# Allegro board ANALYSIS_4.brd
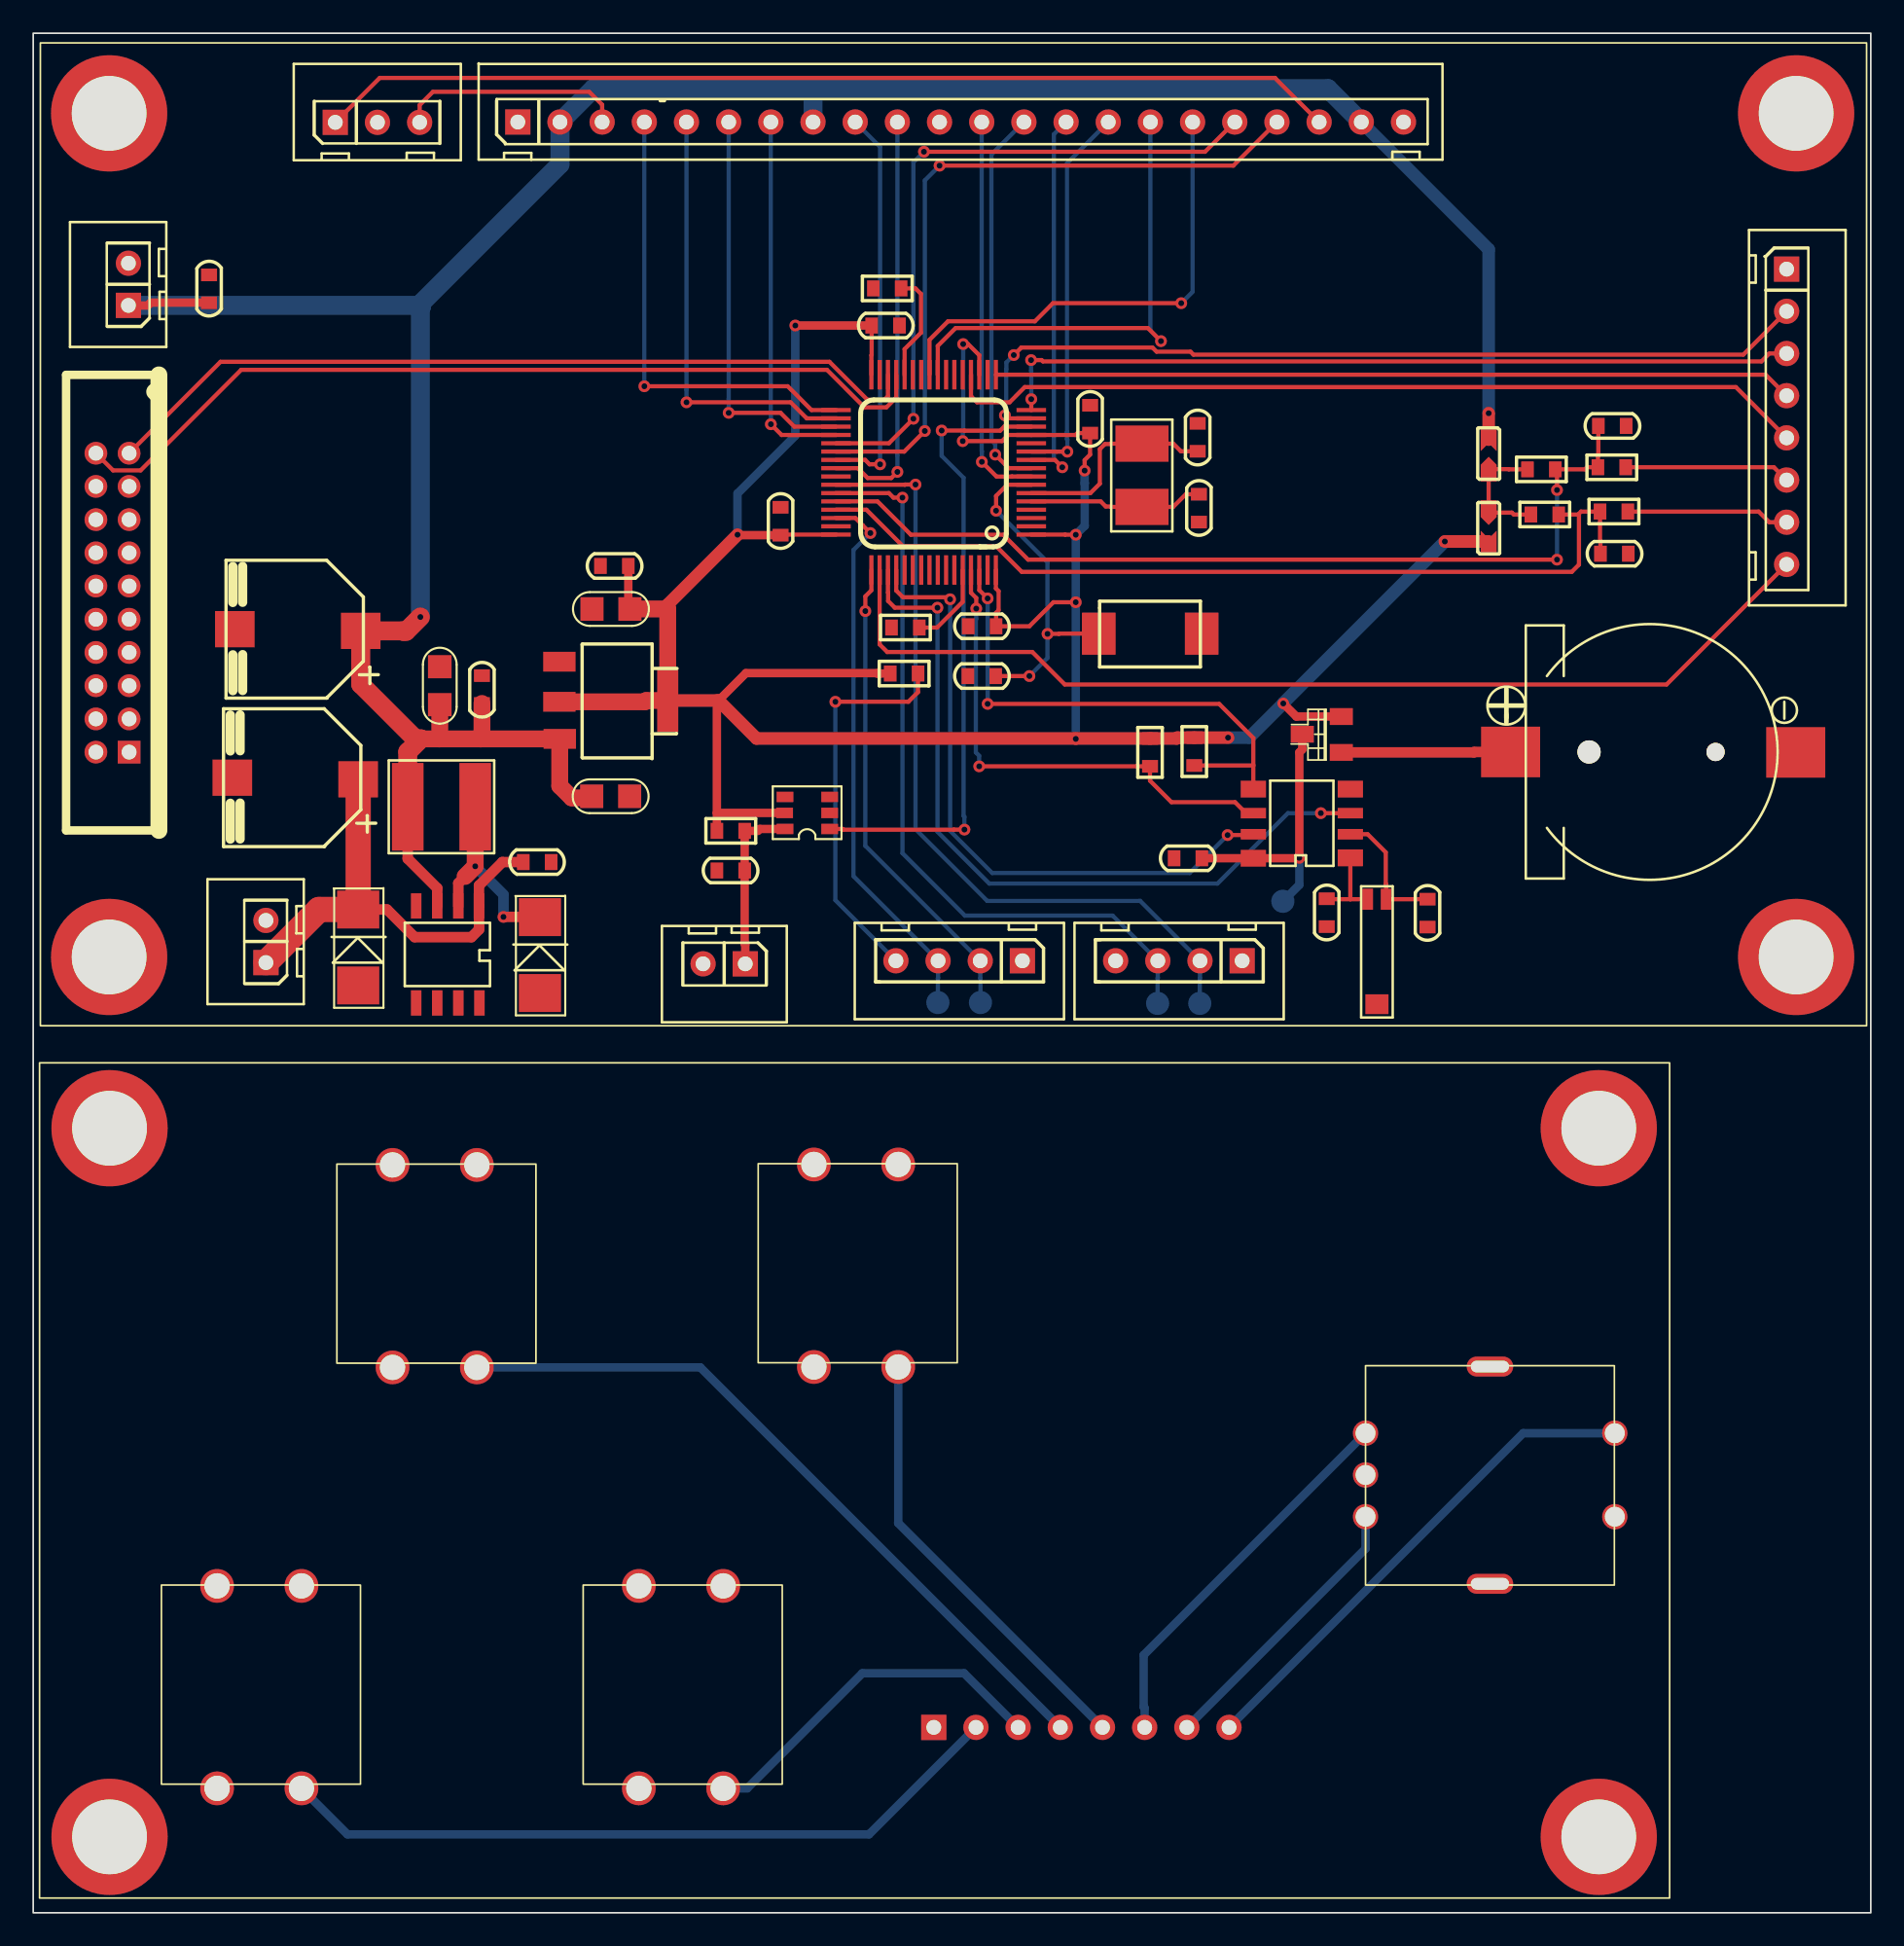
[diagram p0: board, top side]
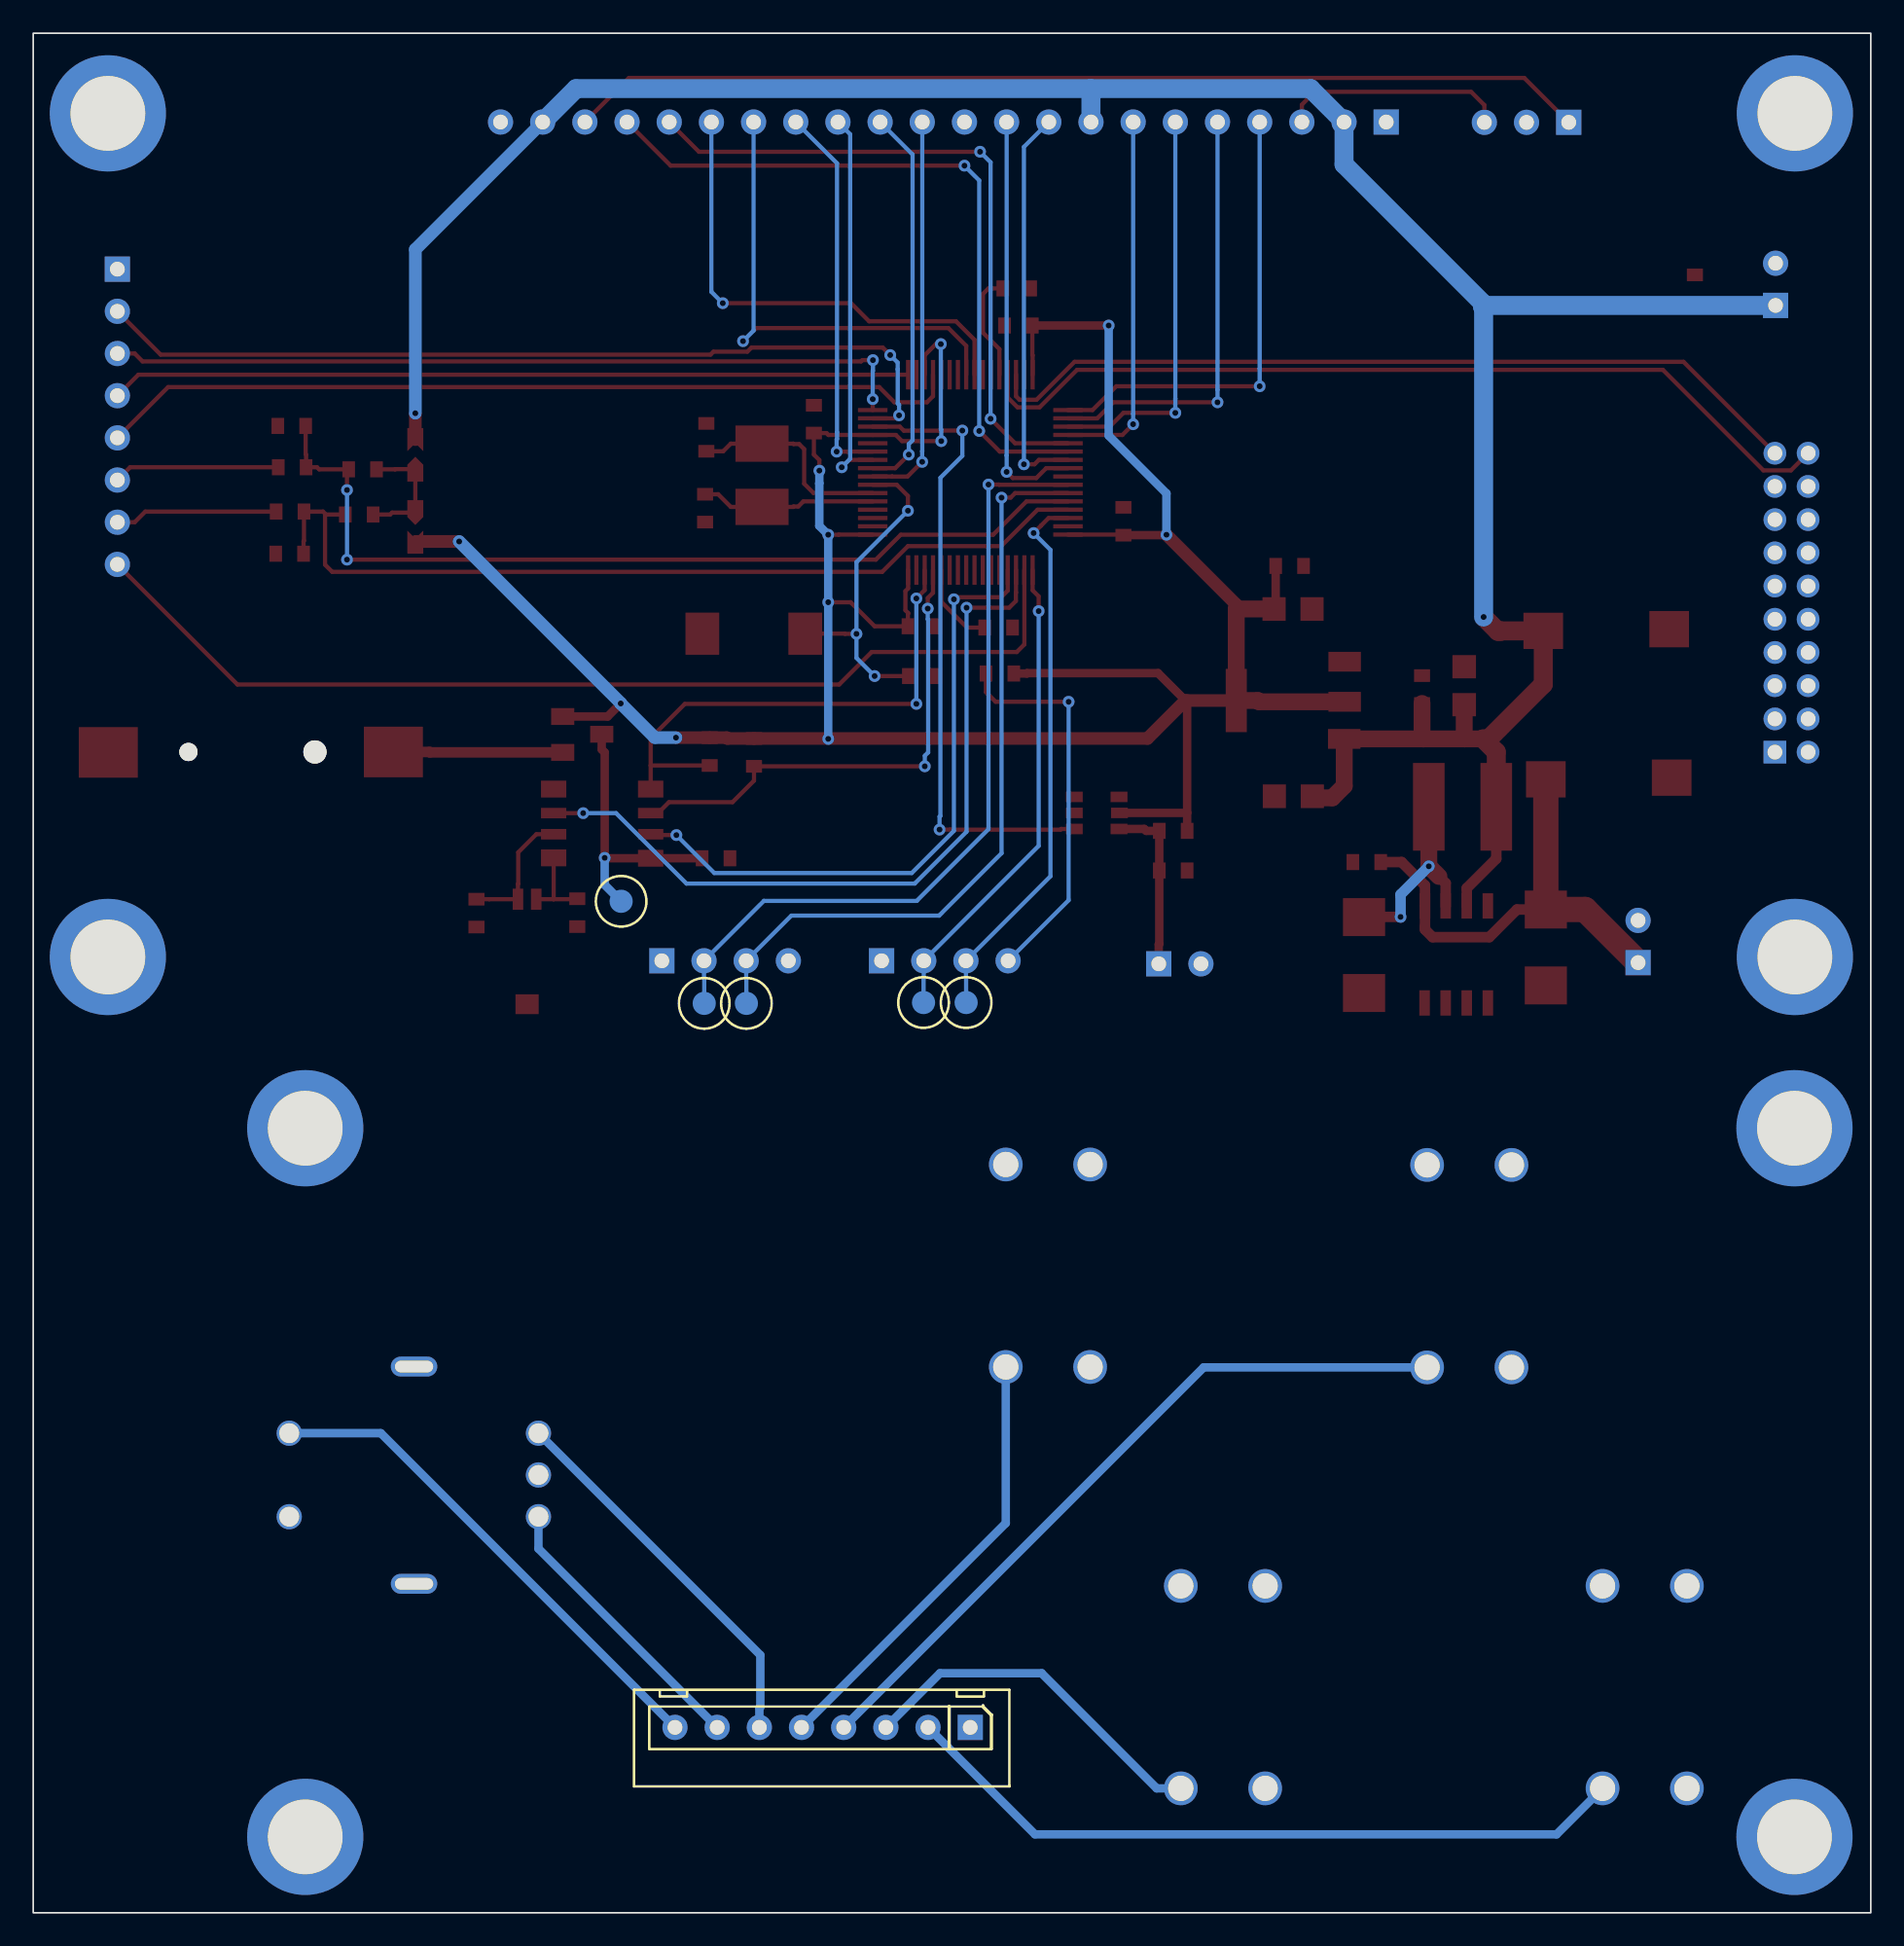
[diagram p1: board, bottom side, seen from below]

Outline 110.67 x 113.18 mm; copper layers: TOP, BOTTOM. Coordinates in mm from the lower left corner of the outline.
Outline path: rectangle 0,0 110.67,113.18

## Placement (name value [footprint] x y rotation side)
C1  0.1uF  [C0603]  51.33 95.58 0 top
C2  0.1uF  [C0603]  63.65 89.94 90 top
C3  0.1uF  [C0603]  45.01 83.79 90 top
C4  0.1uF  [C0603]  10.59 97.79 90 top
C5  0.1uF  [C0603]  42.01 62.76 180 top
C6  0.1uF  [C0603]  57.15 77.47 180 top
C7  15pF  [C0603]  70.13 88.85 270 top
C8  15pF  [C0603]  70.21 84.58 90 top
C9  0.1uF  [C0603]  57.12 74.47 0 top
C10  0.1uF  [C0603]  95.22 81.84 0 top
C11  0.1uF  [C0603]  95.1 89.53 0 top
C12  0.1uF  [C0603]  69.55 63.5 180 top
C13  5pF  [C0603]  83.97 60.2 90 top
C14  5pF  [C0603]  77.9 60.22 90 top
C15  220uf/35V  [CAP_SMD_8X10D5]  17.75 63.3 180 top
C16  0.1uF  [C0603]  30.35 63.27 180 top
C17  220uf/35V  [CAP_SMD_8X10D5]  17.9 72.24 180 top
C18  0.1uF  [C0603]  27.03 73.66 270 top
C19  10uF  [C0805]  24.49 73.89 270 top
C20  10uF  [C0805]  34.79 78.51 0 top
C21  10uF  [C0805]  34.78 67.23 180 top
C22  0.1uF  [C0603]  35 81.1 0 top
D1  BAT54C  [SOT23-3]  77.61 70.97 0 top
D2  SMBJ12A  [SMA]  19.57 58.13 270 top
D3  SS34  [SMA]  30.52 57.67 270 top
H1  NC/mechanical _pad  [HOLE_4D5MM]  4.57 57.56 0 top
H2  NC/mechanical _pad  [HOLE_4D5MM]  4.57 108.36 0 top
H3  NC/mechanical _pad  [HOLE_4D5MM]  106.17 108.36 0 top
H4  NC/mechanical _pad  [HOLE_4D5MM]  106.17 57.56 0 top
H5  NC/mechanical _pad  [HOLE_4D5MM]  4.6 47.24 0 top
H6  NC/mechanical _pad  [HOLE_4D5MM]  4.6 4.57 0 top
H7  NC/mechanical _pad  [HOLE_4D5MM]  94.28 4.57 0 top
H8  NC/mechanical _pad  [HOLE_4D5MM]  94.28 47.24 0 top
J1  HEADER 8  [XH-8A]  54.23 11.15 0 bottom
J2  HEADER 5  [SW3_2]  85.32 26.09 0 top
J3  -  [XH-2A]  5.73 96.79 90 top
J4  HEADER 20X2  [HEADER10X2_2MMP]  4.78 78.89 180 top
J5  HEADER 2  [XH-2A]  42.88 57.14 180 top
J6  0  [DEBUG0603_V1]  87.66 83.55 270 top
J7  0  [DEBUG0603_V1]  87.66 87.69 90 top
J8  HEADER 8  [XH-8A]  105.61 98.98 270 top
J9  LCD  [XH-22A]  32.13 94.59 0 top
JP_1  -  [XH-2A]  14.01 57.22 90 top
JP_SWD1  -  [XH-4A]  59.58 57.33 180 top
JS_BAT1  BAT  [CR1220_SOCKET_V1]  97.26 69.9 270 top
JS_USART1  NC/XH-4A  [XH-4A]  72.81 57.33 180 top
KS_REST  KEY_3x6x2d5_2p_SMD  [KEY_3X6X2D5_2P_SMD]  67.22 77.2 0 top
L1  47UH  [CD54]  24.59 66.6 90 top
NOREF  -  []  0.43 53.42 90 top
NOREF#2  -  []  0.38 0.89 0 top
NOREF#3  -  []  49.56 40.23 90 top
NOREF#4  -  []  4.6 4.57 90 top
NOREF#5  -  []  0.38 0.89 90 top
NOREF#6  -  []  4.6 4.57 0 top
NOREF#7  -  []  4.57 57.56 90 top
NOREF#8  -  []  4.57 108.36 0 top
NOREF#9  -  []  0.43 112.6 0 top
NOREF#10  -  []  49.56 39.19 0 top
R1  220K  [R0603]  42.01 65.15 180 top
R2  10K  [R0603]  91.03 84.2 180 top
R3  10K  [R0603]  90.83 86.92 180 top
R4  10K  [R0603]  52.53 77.39 0 top
R5  10K  [R0603]  51.43 97.82 0 top
R6  10K  [R0603]  95.07 87.05 180 top
R7  10K  [R0603]  95.2 84.38 180 top
R8  10R  [R0603]  52.45 74.63 180 top
R9  10k  [XH-3A]  18.19 107.82 0 top
R10  10K  [R0603]  67.26 69.88 270 top
R11  10K  [R0603]  69.93 69.93 270 top
SW1  SW PUSHBUTTON_0  [SW4L]  16.15 7.49 180 top
SW2  SW PUSHBUTTON_0  [SW4L]  41.55 7.49 180 top
SW3  SW PUSHBUTTON_0  [SW4L]  26.72 32.84 180 top
SW4  SW PUSHBUTTON_0  [SW4L]  52.1 32.87 180 top
T1  NC/TEST  [TEST_55C_SMD]  54.48 54.81 180 bottom
T2  NC/TEST  [TEST_55C_SMD]  57.05 54.81 180 bottom
T3  NC/TEST  [TEST_55C_SMD]  75.26 60.91 180 bottom
T4  NC/TEST  [TEST_55C_SMD]  67.72 54.76 180 bottom
T5  NC/TEST  [TEST_55C_SMD]  70.26 54.76 180 bottom
U1  USBLC6-2SC6  [SOT23-6]  46.62 66.23 90 top
U2  STM32F103RB  [LQFP64]  54.23 86.74 180 top
U3  PCF8563T  [SOP8]  79.07 63.68 90 top
U4  XL1509-5.0  [SOIC8]  24.97 57.71 180 top
U5  LM1117-3.3  [SOT-223]  31.74 73 270 top
Y1  8M  [CY5032_2P]  66.78 86.56 90 top
Y2  32.768KHz  [MC_146]  80.92 57.86 270 top

## Library data of the parts
C1-C22 = C
D1 = BAT54C
D2 D3 = DIODE
H1-H8 = PAD
J1 J8 = HEADER 10_0
J2 = 4 HEADER_2
J3 J5 = HEADER 2
J4 = HEADER 10X2_2
J6 J7 = JUMPER1_0
J9 = HEADER 22_0
JP_1 = header_3d5_6
JP_SWD1 JS_USART1 = HEADER 4
JS_BAT1 = BATT
KS_REST SW1-SW4 = SW PUSHBUTTON_0
L1 = INDUCTOR_0
R1-R8 R10 R11 = R
R9 = R_var_0
T1-T5 = TESTPONT
U1 = USB_MINI_SOCKET_5
U2 = STM32F103
U3 = PCF8563
U4 = XL1509
U5 = 1117
Y1 = CRYSTAL
Y2 = MC_146

## Footprints (pads in the part's own frame, mm; a bottom-side part is the same pattern mirrored in y, then rotated)
C0603
  rect 0.762x0.965 smd: 1(-0.838,0) 2(0.838,0)
C0805
  rect 1.397x1.422 smd: 1(-1.143,0) 2(1.143,0)
CAP_SMD_8X10D5
  rect 2.388x2.184 smd: 1(-1.82,-4.95) 2(5.76,-5.05)
CD54
  rect 5.283x1.905 smd: 1(0,2.032) 2(0,-2.032)
CR1220_SOCKET_V1
  round 1.397 hole 1.397 unplated: (0,-3.556)
  rect 3.048x3.556 smd: 1(0,-8.28) 2(0.025,8.89)
  round 1.092 hole 1.092: 3(0,4.064)
CY5032_2P
  rect 2.184x3.2 smd: 1(-1.905,0) 2(1.905,0)
DEBUG0603_V1
  custom 1.499x0.965 smd: 1(-0.762,0)
  custom 1.397x0.965 smd: 2(1.016,0)
HEADER10X2_2MMP
  rect 1.372x1.372 hole 0.889: 1(-1,9)
  round 1.372 hole 0.889: 2(1,9) 3(-1,7) 4(1,7) 5(-1,5) 6(1,5) 7(-1,3) 8(1,3) 9(-1,1) 10(1,1) 11(-1,-1) 12(1,-1) 13(-1,-3) 14(1,-3) 15(-1,-5) 16(1,-5) 17(-1,-7) 18(1,-7) 19(-1,-9) 20(1,-9)
HOLE_4D5MM
  round 7 hole 4.5: 1(0,0)
KEY_3X6X2D5_2P_SMD
  rect 2.032x2.54 smd: 1(-3.048,-0.178) 2(3.15,-0.178)
LQFP64
  rect 1.778x0.254 smd: 1(-5.88,3.749) 2(-5.88,3.251) 3(-5.88,2.751) 4(-5.88,2.25) 5(-5.88,1.75) 6(-5.88,1.25) 7(-5.88,0.749) 8(-5.88,0.249) 9(-5.88,-0.249) 10(-5.88,-0.749) 11(-5.88,-1.25) 12(-5.88,-1.75) 13(-5.88,-2.25) 14(-5.88,-2.751) 15(-5.88,-3.251) 16(-5.88,-3.749) 33(5.88,-3.749) 34(5.88,-3.251) 35(5.88,-2.751) 36(5.88,-2.25) 37(5.88,-1.75) 38(5.88,-1.25) 39(5.88,-0.749) 40(5.88,-0.249) 41(5.88,0.249) 42(5.88,0.749) 43(5.88,1.25) 44(5.88,1.75) 45(5.88,2.25) 46(5.88,2.751) 47(5.88,3.251) 48(5.88,3.749)
  rect 0.254x1.778 smd: 17(-3.749,-5.88) 18(-3.251,-5.88) 19(-2.751,-5.88) 20(-2.25,-5.88) 21(-1.75,-5.88) 22(-1.25,-5.88) 23(-0.749,-5.88) 24(-0.249,-5.88) 25(0.249,-5.88) 26(0.749,-5.88) 27(1.25,-5.88) 28(1.75,-5.88) 29(2.25,-5.88) 30(2.751,-5.88) 31(3.251,-5.88) 32(3.749,-5.88) 49(3.749,5.88) 50(3.251,5.88) 51(2.751,5.88) 52(2.25,5.88) 53(1.75,5.88) 54(1.25,5.88) 55(0.749,5.88) 56(0.249,5.88) 57(-0.249,5.88) 58(-0.749,5.88) 59(-1.25,5.88) 60(-1.75,5.88) 61(-2.25,5.88) 62(-2.751,5.88) 63(-3.251,5.88) 64(-3.749,5.88)
MC_146
  rect 1.27x0.635 smd: 1(-3.173,0.55) 2(-3.173,-0.55)
  rect 1.194x1.397 smd: 3(3.15,0)
R0603
  rect 0.762x0.965 smd: 1(-0.838,0) 2(0.838,0)
SMA
  rect 2.286x2.54 smd: 1(2.286,0) 2(-2.286,0)
SOIC8
  rect 0.635x1.524 smd: 1(-1.88,-2.921) 2(-0.635,-2.921) 3(0.635,-2.921) 4(1.905,-2.921) 5(1.905,2.921) 6(0.635,2.921) 7(-0.635,2.921) 8(-1.905,2.921)
SOP8
  rect 1.016x1.524 smd: 1(-0.152,-0.254) 4(3.988,-0.254) 5(3.988,5.588) 8(-0.178,5.588)
  rect 0.635x1.524 smd: 2(1.27,-0.254) 3(2.54,-0.254) 6(2.54,5.588) 7(1.27,5.588)
SOT23-3
  rect 1.397x1.016 smd: 1(1.168,-1.092) 2(1.168,1.067) 3(-1.181,0)
SOT23-6
  rect 0.635x1.016 smd: 1(-0.965,-1.346) 2(0,-1.346) 3(0.965,-1.346) 4(0.965,1.346) 5(0,1.372) 6(-0.965,1.346)
SOT-223
  rect 1.194x1.956 smd: 1(-2.337,-0.051) 2(0.076,-0.051) 3(2.311,-0.025)
  rect 3.81x1.27 smd: 4(0,6.477)
SW3_2
  round 1.524 hole 1.194: 1(-5.08,2.794) 2(-5.08,0.279) 3(-5.08,-2.235) 4(9.931,2.794) 5(9.931,-2.235)
  oval 2.8x1.2 hole 2.3x0.7: 6(2.413,6.807) 7(2.413,-6.274)
SW4L
  round 2.032 hole 1.524: 1(0,0) 2(0,-12.192) 3(5.08,0) 4(5.08,-12.192)
TEST_55C_SMD
  round 1.397 smd: 1(0,0)
XH-2A
  rect 1.524x1.524 hole 0.889: 1(0,0)
  round 1.524 hole 0.889: 2(2.54,0)
XH-3A
  rect 1.524x1.524 hole 0.889: 1(0,0)
  round 1.524 hole 0.889: 2(2.54,0) 3(5.08,0)
XH-4A
  rect 1.524x1.524 hole 0.889: 1(0,0)
  round 1.524 hole 0.889: 2(2.54,0) 3(5.08,0) 4(7.62,0)
XH-8A
  rect 1.524x1.524 hole 0.889: 1(0.005,-0.013)
  round 1.524 hole 0.889: 2(2.545,-0.013) 3(5.085,-0.013) 4(7.625,-0.013) 5(10.165,-0.013) 6(12.705,-0.013) 7(15.245,-0.013) 8(17.785,-0.013)
XH-22A
  rect 1.524x1.524 hole 0.889: 1(-2.942,13.25)
  round 1.524 hole 0.889: 2(-0.402,13.25) 3(2.138,13.25) 4(4.678,13.25) 5(7.218,13.25) 6(9.758,13.25) 7(12.298,13.25) 8(14.838,13.25) 9(17.378,13.25) 10(19.918,13.25) 11(22.458,13.25) 12(24.998,13.25) 13(27.538,13.25) 14(30.078,13.25) 15(32.618,13.25) 16(35.158,13.25) 17(37.698,13.25) 18(40.238,13.25) 19(42.778,13.25) 20(45.318,13.25) 21(47.858,13.25) 22(50.398,13.25)

## Nets
GND: C1.2 C2.2 C3.2 C4.2 C5.2 C6.2 C7.1 C8.1 C9.1 C10.2 C11.2 C12.2 C13.1 C14.1 C15.2 C16.1 C17.2 C18.1 C19.1 C20.1 C21.1 C22.1 D2.1 D3.1 J1.1 J2.2(G1) J2.5(G2) J3.2 J4.16(GND) J5.2 J8.1 J9.1(VSS) J9.22(LEDK) JP_1.2 JP_SWD1.1 JS_BAT1.2(-) JS_USART1.1 KS_REST.2 R4.1 R5.1 R9.2 SW1.3 SW1.4 SW2.3 SW2.4 SW3.3 SW3.4 SW4.3 SW4.4 U1.2(GND) U2.12(VSSA) U2.18(VSS_4) U2.31(VSS_1) U2.47(VSS_2) U2.63(VSS_3) U3.4(VSS) U4.4(EN) U4.5(GND1) U4.6(GND2) U4.7(GND3) U4.8(GND4) U5.1 Y2.3(GND)
VBAT_CR1220: D1.1(C1) JS_BAT1.1(+)
VCC_5V: C4.1 C17.1 C18.2 C19.2 C21.2 J3.1 J7.2 J9.2(VDD) J9.8(CS2) J9.21(LEDA) L1.1 U4.3(FB) U5.3(IN)
VCC_9V: C15.1 C16.2 D2.2 JP_1.1 U4.1(VIN)
VDD_3V3: C1.1 C2.1 C3.1 C6.1 C20.2 C22.2 D1.2(C2) J6.2 R1.2 R8.2 R10.1 R11.1 U1.5(VBUS) U2.1(VBAT) U2.13(VDDA) U2.19(VDD_4) U2.32(VDD_1) U2.48(VDD_2) U2.64(VDD_3) U5.2(OUT) U5.4
/CS1: J9.7(/CS1) U2.36(PB15/TIM1_CH3N/SPI2_MOSI)
/RD: J9.6(/RD) U2.35(PB14/TIM1_CH2N/SPI2_MISO)
/RST: J9.11(/RST)
/WR: J9.5(/WR) U2.34(PB13/TIM1_CH1N/SPI2_SCK)
BOOT0: R4.2 U2.60(BOOT0)
BOOT1: R5.2 U2.28(PB2/BOOT1)
BUSY: J9.9(BUSY) U2.39(PC8/TIM3_CH3)
DB0: J9.12(DB0) U2.8(PC0/ADC12_IN10)
DB1: J9.13(DB1) U2.9(PC1/ADC12_IN11)
DB2: J9.14(DB2) U2.10(PC2/ADC12_IN12)
DB3: J9.15(DB3) U2.11(PC3/ADC12_IN13)
DB4: J9.16(DB4) U2.24(PC4/ADC12_IN14)
DB5: J9.17(DB5) U2.25(PC5/ADC12_IN15)
DB6: J9.18(DB6) U2.37(PC6/TIM3_CH1)
DB7: J9.19(DB7) U2.38(PC7/TIM3_CH2)
EC11_A: C11.1 R3.1 R6.2 U2.44(PA11/USART1_CTS/CANRX/TIM1_CH4/)
EC11_B: C10.1 R2.1 R7.2 U2.45(PA12/USART1_RTS/CANTX/TIM1_ETR/)
EC11_C: J8.8 U2.50(PA15/JTDI/TIM2_CH1_ETR/SPI1_NSS)
EC11_K: J1.8 J2.4(KEY)
I2C1_SCL: R10.2 U2.61(PB8/I2C1_SCL/CANRX) U3.6(SCL)
I2C1_SDA: R11.2 U2.62(PB9/I2C1_SDA/CANTX) U3.5(SDA)
KEY1: J1.2 SW1.1
KEY2: J1.3 SW2.1
KEY3: J1.4 SW3.1
KEY4: J1.5 SW4.1
KEY_1: J8.2 U2.15(PA1/USART2_RTS/ADC12_IN1/TIM2_C)
KEY_2: J8.3 U2.16(PA2/USART2_TX/ADC12_IN2/TIM2_CH)
KEY_3: J8.4 U2.17(PA3/USART2_RX/ADC12_IN3/TIM2_CH)
KEY_4: J8.5 U2.20(PA4/SPI1_NSS/USART2_CK/ADC12_IN)
LCD_INT: J9.10(INT) U2.40(PC9/TIM3_CH4)
RS: J9.4(RS) U2.33(PB12/TIM1_BKIN/SPI2_NSS)
RTC_CLKOUT: U2.52(PC11) U3.7(CLKOUT)
RTC_INT: U2.51(PC10) U3.3(I\N\T\)
STM32_REST: C9.2 KS_REST.1 U2.7(NRST)
SWCLK: JP_SWD1.2 T2.1 U2.49(PA14/JTCK/SWCLK)
SWDIO: JP_SWD1.3 T1.1 U2.46(PA13/JTMS/SWDIO)
USART1_RX_PA10: JS_USART1.3 T4.1 U2.43(PA10/USART1_RX/TIM1_CH3)
USART1_TX_PA9: JS_USART1.2 T5.1 U2.42(PA9/USART1_TX/TIM1_CH2)
USART3_RXD: J4.19(TXD) U2.30(PB11/TIM2_CH4/USART3_RX)
USART3_TXD: J4.20(RXD) U2.29(PB10/TIM2_CH3/USART3_TX)
N201627: C12.1 D1.3(A) T3.1 U3.8(VDD)
N201649: C14.2 U3.1(OSCI) Y2.2
N202031: JP_SWD1.4 R8.1
N202175: C7.2 U2.6(PD1 OSC_OUT/CANTX) Y1.2
N202187: C8.2 U2.5(PD0 OSC_IN/CANRX) Y1.1
N203157: C13.2 U3.2(OSCO) Y2.1
N208876: D3.2 L1.2 U4.2(OUTPUT)
N211508: U1.1(I/O1) U2.14(PA0-WKUP/USART2_CTS/ADC12_IN0/T)
N214712: C5.1 J5.1 R1.1 U1.6(I/O1X)
N215803: J6.1 J7.1 R2.2 R3.2
N217465: J8.7 R7.1
N217476: J8.6 R6.1
N232878: J9.3(V0) R9.3
N232980: J9.20(VEE) R9.1
N235811: J1.7 J2.3(B)
N235857: J1.6 J2.1(A)

Pads without a net: H1 1; H2 1; H3 1; H4 1; H5 1; H6 1; H7 1; H8 1; J2 6 7; J4 1 2 3 4 5 6 7 8 9 10 11 12 13 14 15 17 18; JS_BAT1 3; JS_USART1 4; SW1 2; SW2 2; SW3 2; SW4 2; U1 3 4; U2 2 3 4 21 22 23 26 27 41 53 54 55 56 57 58 59

## Via types
v1: diameter 0.711, hole 0.356, TOP to BOTTOM, 56 vias

## Routing (per net, layer and track width the routed paths; a pad name or vN(x,y) marks a point on that pad's centre or on a via; arc(x,y) is an arc through that point)
VBAT_CR1220: length 10.2
  TOP w0.635: JS_BAT1.1 86.79,69.9 86.77,69.88 D1.1
VCC_5V: length 171.1
  TOP w0.508: J3.1 6.9,96.79 7.06,96.95 C4.1
  TOP w0.635: U4.3 24.33,61.7 22.56,63.47 L1.1
  TOP w0.762: J7.2 v1(87.66,90.3)
  TOP w1.016: 26.95,70.69 U5.3 31.71,67.86 32.43,67.14 33.54,67.14 C21.2 ; 26.95,70.69 27.03,70.76 C18.2 ; 26.95,70.69 24.46,70.69 ; 24.46,70.69 24.49,70.71 C19.2 ; 24.46,70.69 23.34,70.69
  TOP w1.143: v1(23.32,78.03) 22.45,77.17 22.29,77.17 22.26,77.19 C17.1 19.72,73.98 23.01,70.69 23.34,70.69 22.56,69.9 L1.1
  BOTTOM w0.762: v1(87.66,90.3) 87.66,100.16 J9.21
  BOTTOM w1.143: J3.1 23.26,96.79 23.37,96.69 ; 23.37,96.69 23.32,96.64 v1(23.32,78.03) ; 23.37,96.69 23.37,96.93 31.72,105.28 J9.2 33.74,109.85 46.96,109.85 ; 46.96,109.85 77.97,109.85 J9.21 ; 46.96,109.85 J9.8
VCC_9V: length 28.8
  TOP w0.635: D2.2 21.31,60.41 22.97,58.75 26.39,58.75 26.85,59.21 26.85,59.4 U4.1 26.85,61.86 28.26,63.27 C16.2
  TOP w1.524: JP_1.1 17.21,60.41 D2.2 19.57,60.41 C15.1
VDD_3V3: length 179.4
  TOP w0.254: v1(56.01,94.46) 56.3,94.46 56.98,93.79 U2.19 ; v1(55.98,88.62) 58.34,88.62 58.71,88.99 U2.13 62.78,88.99 62.89,89.1 C2.1 63.65,87.81 63.32,87.48 v1(63.32,86.84) ; U2.64 57.98,79.75 58.14,79.59 58.14,78.44 57.98,78.27 57.98,78.24 57.99,78.23 C6.1 59.99,77.47 61.44,78.92 v1(62.79,78.92) ; v1(62.79,82.98) 62.15,82.98 62.14,82.99 U2.1 ; C1.1 50.5,93.8 50.48,93.79 U2.32 ; 62.79,70.71 v1(62.79,70.69) ; U2.48 45.01,82.99 C3.1
  TOP w0.508: 41.17,66.24 41.17,73 ; 41.17,66.24 R1.2 ; 41.17,66.24 41.19,66.23 U1.5 ; C22.2 35.84,78.61 C20.2 ; 51.61,74.63 50.83,74.63 50.8,74.65 42.93,74.65 41.27,73 ; C1.1 v1(45.9,95.58) ; C3.1 42.44,82.96 v1(42.42,82.98) ; v1(75.29,72.82) 76.07,72.03 D1.2
  TOP w0.762: U5.4 41.27,73 43.56,70.71 R10.1 68.86,70.71 68.91,70.76 R11.1 v1(71.96,70.76) ; 38.21,78.51 38.21,78.78 v1(42.42,82.98) ; v1(85.01,82.58) 87.62,82.58 J6.2
  TOP w1.016: U5.2 36.84,72.92 36.92,73 U5.4 38.21,78.51 C20.2
  BOTTOM w0.254: v1(56.01,94.46) 56.01,89.33 55.98,89.31 v1(55.98,88.62)
  BOTTOM w0.508: v1(45.9,95.58) 45.9,88.95 42.42,85.47 v1(42.42,82.98) ; v1(62.79,70.69) v1(62.79,78.92) v1(62.79,82.98) 63.33,83.52 63.33,86.08 63.32,86.08 v1(63.32,86.84)
  BOTTOM w0.762: v1(85.01,82.58) 75.29,72.85 v1(75.29,72.82) 73.23,70.76 v1(71.96,70.76)
/CS1: length 22.4
  TOP w0.254: U2.36 45.07,88.99 v1(44.42,89.64)
  BOTTOM w0.254: v1(44.42,89.64) 44.42,90.27 J9.7
/RD: length 24.3
  TOP w0.254: v1(41.88,90.32) 45.01,90.32 45.84,89.49 U2.35
  BOTTOM w0.254: J9.6 41.88,91.16 v1(41.88,90.32)
/WR: length 26.3
  TOP w0.254: U2.34 46.58,89.99 45.62,90.96 v1(39.34,90.96)
  BOTTOM w0.254: v1(39.34,90.96) 39.34,91.72 J9.5
BOOT0: length 5.2
  TOP w0.254: U2.60 55.98,78.94 54.43,77.39 R4.2
BOOT1: length 6.6
  TOP w0.254: U2.28 52.48,94.16 53.47,95.15 53.47,97.49 53.14,97.82 R5.2
BUSY: length 24
  TOP w0.254: v1(51,87.22) 50.37,87.22 50.1,87.49 U2.39
  BOTTOM w0.254: v1(51,87.22) 51,106.34 J9.9
DB0: length 23.8
  TOP w0.254: U2.8 58.94,86.49 58.94,86.49 58.01,86.49 57.12,87.38 57.12,87.37 v1(57.13,87.37)
  BOTTOM w0.254: J9.12 57.12,88.01 57.13,88 v1(57.13,87.37)
DB1: length 23.4
  TOP w0.254: v1(57.94,87.81) 58.76,86.99 U2.9
  BOTTOM w0.254: v1(57.94,87.81) 57.94,88.44 57.71,88.67 57.71,105.88 J9.13
DB2: length 23.4
  TOP w0.254: U2.10 61.53,87.49 v1(61.98,87.05)
  BOTTOM w0.254: J9.14 61.47,107.1 61.47,87.55 v1(61.98,87.05)
DB3: length 23.1
  TOP w0.254: v1(62.28,87.99) 61.65,87.99 61.64,87.99 U2.11
  BOTTOM w0.254: J9.15 62.26,105.35 62.26,89.15 62.26,89.15 62.26,88.75 62.28,88.72 v1(62.28,87.99)
DB4: length 29.4
  TOP w0.254: U2.24 54.48,94.35 55.55,95.43 67.13,95.43 v1(67.92,94.64)
  BOTTOM w0.254: v1(67.92,94.64) 67.28,95.28 J9.16
DB5: length 29.4
  TOP w0.254: U2.25 53.98,94.72 55.09,95.83 60.32,95.83 61.42,96.93 v1(69.14,96.93)
  BOTTOM w0.254: v1(69.14,96.93) 69.82,97.61 J9.17
DB6: length 41.1
  TOP w0.254: v1(53.01,89.97) 51.53,88.49 U2.37 ; J9.18 70.57,106.05 v1(53.64,106.05)
  BOTTOM w0.254: v1(53.64,106.05) 53.01,105.41 v1(53.01,89.97)
DB7: length 43.6
  TOP w0.254: v1(53.7,89.23) 52.45,87.99 U2.38 ; v1(54.58,105.21) 72.28,105.21 J9.19
  BOTTOM w0.254: v1(54.58,105.21) 53.7,104.32 v1(53.7,89.23)
EC11_A: length 55.5
  TOP w0.254: v1(91.77,85.67) 91.77,86.82 R3.1 93.45,86.92 93.57,87.05 R6.2 94.23,87.81 94.26,87.83 C11.1 ; U2.44 50.85,84.99 52.86,82.98 58.42,82.98 59.92,81.48 v1(91.77,81.48)
  BOTTOM w0.254: v1(91.77,81.48) v1(91.77,85.67)
EC11_B: length 54.6
  TOP w0.254: 93.04,84.2 93.09,84.15 93.09,81.18 92.66,80.75 59.54,80.75 57.99,82.3 52.37,82.3 50.18,84.49 U2.45 ; 93.04,84.2 93.22,84.38 R7.2 94.36,82.63 94.39,82.6 C10.1 ; 93.04,84.2 R2.1
EC11_C: length 63.1
  TOP w0.254: J8.8 98.37,73.96 62.13,73.96 60.17,75.92 51.43,75.92 50.98,76.38 U2.50
EC11_K: length 30.6
  BOTTOM w0.508: J1.8 89.73,28.88 J2.4
I2C1_SCL: length 30.2
  TOP w0.254: v1(56.97,69.04) R10.2 67.26,68.17 68.55,66.88 72.38,66.88 73.04,66.22 U3.6 ; v1(56.79,78.54) 56.79,79.17 56.48,79.49 U2.61
  BOTTOM w0.254: v1(56.79,78.54) 56.79,77.9 56.77,77.88 56.77,69.88 56.97,69.67 v1(56.97,69.04)
I2C1_SDA: length 31.8
  TOP w0.254: 73.48,69.09 73.48,70.74 71.42,72.8 v1(57.48,72.8) ; 73.48,69.09 R11.2 ; 73.48,69.09 U3.5 ; U2.62 56.98,79.65 v1(57.48,79.15)
  BOTTOM w0.254: v1(57.48,79.15) v1(57.48,72.8)
KEY1: length 44.4
  BOTTOM w0.508: SW1.1 18.92,4.72 50.34,4.72 J1.2
KEY2: length 22
  BOTTOM w0.508: J1.3 56.05,14.43 49.94,14.43 43,7.49 SW2.1
KEY3: length 44.1
  BOTTOM w0.508: SW3.1 40.18,32.84 J1.4
KEY4: length 26.8
  BOTTOM w0.508: J1.5 52.1,23.47 SW4.1
KEY_1: length 53.5
  TOP w0.254: J8.2 102.99,93.83 69.88,93.83 69.7,94.01 67.66,94.01 67.41,94.25 59.5,94.25 v1(59.05,93.8) ; v1(58.52,90.17) 58.7,89.99 U2.15
  BOTTOM w0.254: v1(59.05,93.8) 58.61,93.35 58.61,92.95 58.6,92.94 58.6,90.88 58.52,90.81 v1(58.52,90.17)
KEY_2: length 48.7
  TOP w0.254: v1(60.1,93.5) 60.73,93.5 60.81,93.42 104.08,93.42 104.56,93.9 J8.3 ; U2.16 v1(60.11,91.15)
  BOTTOM w0.254: v1(60.1,93.5) 60.1,92.86 60.11,92.85 v1(60.11,91.15)
KEY_3: length 48.1
  TOP w0.254: J8.4 104.34,92.62 U2.17
KEY_4: length 52.2
  TOP w0.254: J8.5 102.54,91.87 59.72,91.87 58.8,90.96 56.85,90.96 56.48,91.32 U2.20
LCD_INT: length 25.2
  TOP w0.254: U2.40 49.66,86.99 50.26,86.4 51.68,86.4 v1(52.04,86.77)
  BOTTOM w0.254: J9.10 52.04,87.76 v1(52.04,86.77)
RS: length 28
  TOP w0.254: U2.33 46.87,90.49 45.44,91.92 v1(36.8,91.92)
  BOTTOM w0.254: v1(36.8,91.92) 36.8,92.99 J9.4
RTC_CLKOUT: length 38.9
  TOP w0.254: v1(55.22,79.1) 55.09,79.22 52.37,79.22 51.98,79.62 U2.52 ; U3.7 73.43,64.9 v1(71.93,64.9)
  BOTTOM w0.254: v1(55.22,79.1) 55.22,65.15 57.76,62.61 69.65,62.61 v1(71.93,64.9)
RTC_INT: length 46.4
  TOP w0.254: U2.51 51.48,79.5 51.49,79.49 51.49,78.99 51.89,78.59 v1(54.46,78.59) ; v1(77.55,66.22) U3.3
  BOTTOM w0.254: v1(54.46,78.59) 54.46,65.1 57.58,61.98 71.32,61.98 75.56,66.22 v1(77.55,66.22)
STM32_REST: length 20.1
  TOP w0.254: v1(59.99,74.47) C9.2 ; v1(57.99,84.43) 57.99,85.32 58.66,85.99 U2.7 ; v1(61.09,77.01) 61.77,77.01 61.79,77.03 KS_REST.1
  BOTTOM w0.254: v1(59.99,74.47) 61.09,75.56 v1(61.09,77.01) 61.09,81.33 v1(57.99,84.43)
SWCLK: length 29.1
  TOP w0.254: v1(50.11,78.38) 50.11,79.27 50.48,79.64 U2.49
  BOTTOM w0.254: v1(50.11,78.38) 50.11,64.25 JP_SWD1.2 57.04,56.29 57.05,56.27 T2.1
SWDIO: length 33.3
  TOP w0.254: v1(50.42,83.08) 49.97,83.53 49.97,83.54 49.52,83.99 U2.46
  BOTTOM w0.254: T1.1 54.48,56.27 54.5,56.29 JP_SWD1.3 49.4,62.42 49.4,82.07 v1(50.42,83.08)
USART1_RX_PA10: length 46.2
  TOP w0.254: U2.43 51.53,85.49 51.81,85.22 v1(52.35,85.22)
  BOTTOM w0.254: T4.1 67.72,56.27 67.73,56.29 JS_USART1.3 65.01,60.05 56.11,60.05 52.35,63.8 v1(52.35,85.22)
USART1_TX_PA9: length 48.5
  TOP w0.254: U2.42 52.49,85.99 52.5,86 v1(53.14,86)
  BOTTOM w0.254: v1(53.14,86) 53.14,65.25 57.45,60.93 66.66,60.93 JS_USART1.2 70.27,56.29 70.26,56.27 T5.1
USART3_RXD: length 50.3
  TOP w0.254: U2.30 51.48,91.32 51.27,91.11 50.24,91.11 47.96,93.4 11.28,93.4 J4.19
USART3_TXD: length 53.7
  TOP w0.254: J4.20 4.81,86.86 6.47,86.86 12.52,92.91 47.8,92.91 50.06,90.65 51.38,90.65 51.98,91.25 U2.29
N201627: length 16.4
  TOP w0.508: D1.3 76.43,70.05 76.25,69.88 v1(76.25,63.53) 76.23,63.5 U3.8 C12.1
  BOTTOM w0.508: v1(76.25,63.53) 76.25,61.9 T3.1
N201649: length 5
  TOP w0.254: 79.32,61.04 Y2.2 ; 79.32,61.04 U3.1 ; 79.32,61.04 77.93,61.04 C14.2
N202031: length 23.4
  TOP w0.254: v1(48.31,72.92) 52.7,72.92 53.29,73.51 R8.1
  BOTTOM w0.254: JP_SWD1.4 48.31,60.97 v1(48.31,72.92)
N202175: length 12.7
  TOP w0.254: C7.2 69.11,88.01 68.66,88.47 Y1.2 64.9,88.47 64.87,88.44 64.54,88.44 64.24,88.14 64.24,86.06 63.67,85.49 U2.6
N202187: length 10.6
  TOP w0.254: C8.2 69.42,85.42 68.66,84.66 Y1.1 64.9,84.66 64.87,84.68 64.59,84.68 64.29,84.99 U2.5
N203157: length 7.9
  TOP w0.254: U3.2 80.37,64.95 81.46,63.86 81.46,61.97 81.47,61.95 Y2.1 83.21,61.04 C13.2
N208876: length 12.3
  TOP w0.635: D3.2 30.51,59.97 v1(28.32,59.97) ; 26.01,62.41 25.6,62 U4.2
  TOP w1.016: 26.01,62.41 v1(26.62,63.02) L1.2
  BOTTOM w0.635: v1(26.62,63.02) 28.32,61.32 v1(28.32,59.97)
N211508: length 38.2
  TOP w0.254: v1(56.08,65.23) 55.45,65.23 55.44,65.22 48.8,65.22 48.76,65.27 U1.1 ; U2.14 58.48,89.49 58.23,89.25 56.09,89.25 56.08,89.26 v1(54.71,89.26)
  BOTTOM w0.254: v1(56.08,65.23) 56.08,66 56.03,66.05 56.03,86.41 54.71,87.73 v1(54.71,89.26)
N214712: length 10.5
  TOP w0.508: U1.6 43.75,65.27 43.64,65.15 R1.1 C5.1 42.85,58.35 42.88,58.31 J5.1
N215803: length 7.5
  TOP w0.254: R3.2 88.87,86.92 88.86,86.93 J7.1 J6.1 89.05,84.32 89.17,84.2 R2.2
N217465: length 9.8
  TOP w0.254: J8.7 104.56,83.74 103.92,84.38 R7.1
N217476: length 10
  TOP w0.254: J8.6 104.83,87.05 R6.1
N232878: length 13.7
  TOP w0.254: R9.3 23.27,108.86 24.07,109.65 33.49,109.65 34.26,108.88 J9.3
N232980: length 61.5
  TOP w0.254: R9.1 20.87,110.49 74.79,110.49 J9.20
N235811: length 17.1
  BOTTOM w0.508: J2.3 80.24,21.93 J1.7
N235857: length 23.3
  BOTTOM w0.508: J2.1 66.88,15.52 66.88,12.39 66.94,12.33 J1.6

## Text on the board
DIMENSION: FIGURE | SIZE | 12.0 | 14.0 | 24.0 | 35.0 | 60.0 | 65.0 | 137.795 | 118.11x39.37 | DRILL CHART: TOP to BOTTOM | ALL UNITS ARE IN MILS | PLATED | QTY | 38 | 381 | 42 | 37 | 11 | 24 | 12 | 2 | 1
